# Altium PCB FRONT.PcbDoc (part 3 of 5)
Units mm, origin at the board's own origin, x right, y up, seen from the top; angles counter-clockwise.
Board outline 100 x 68 mm, 4 copper layers (Top Layer, Layer 1, Layer 2, Bottom Layer), stack 1.484 mm thick; 322 components, 276 nets, 1438 pads, 1119 vias.
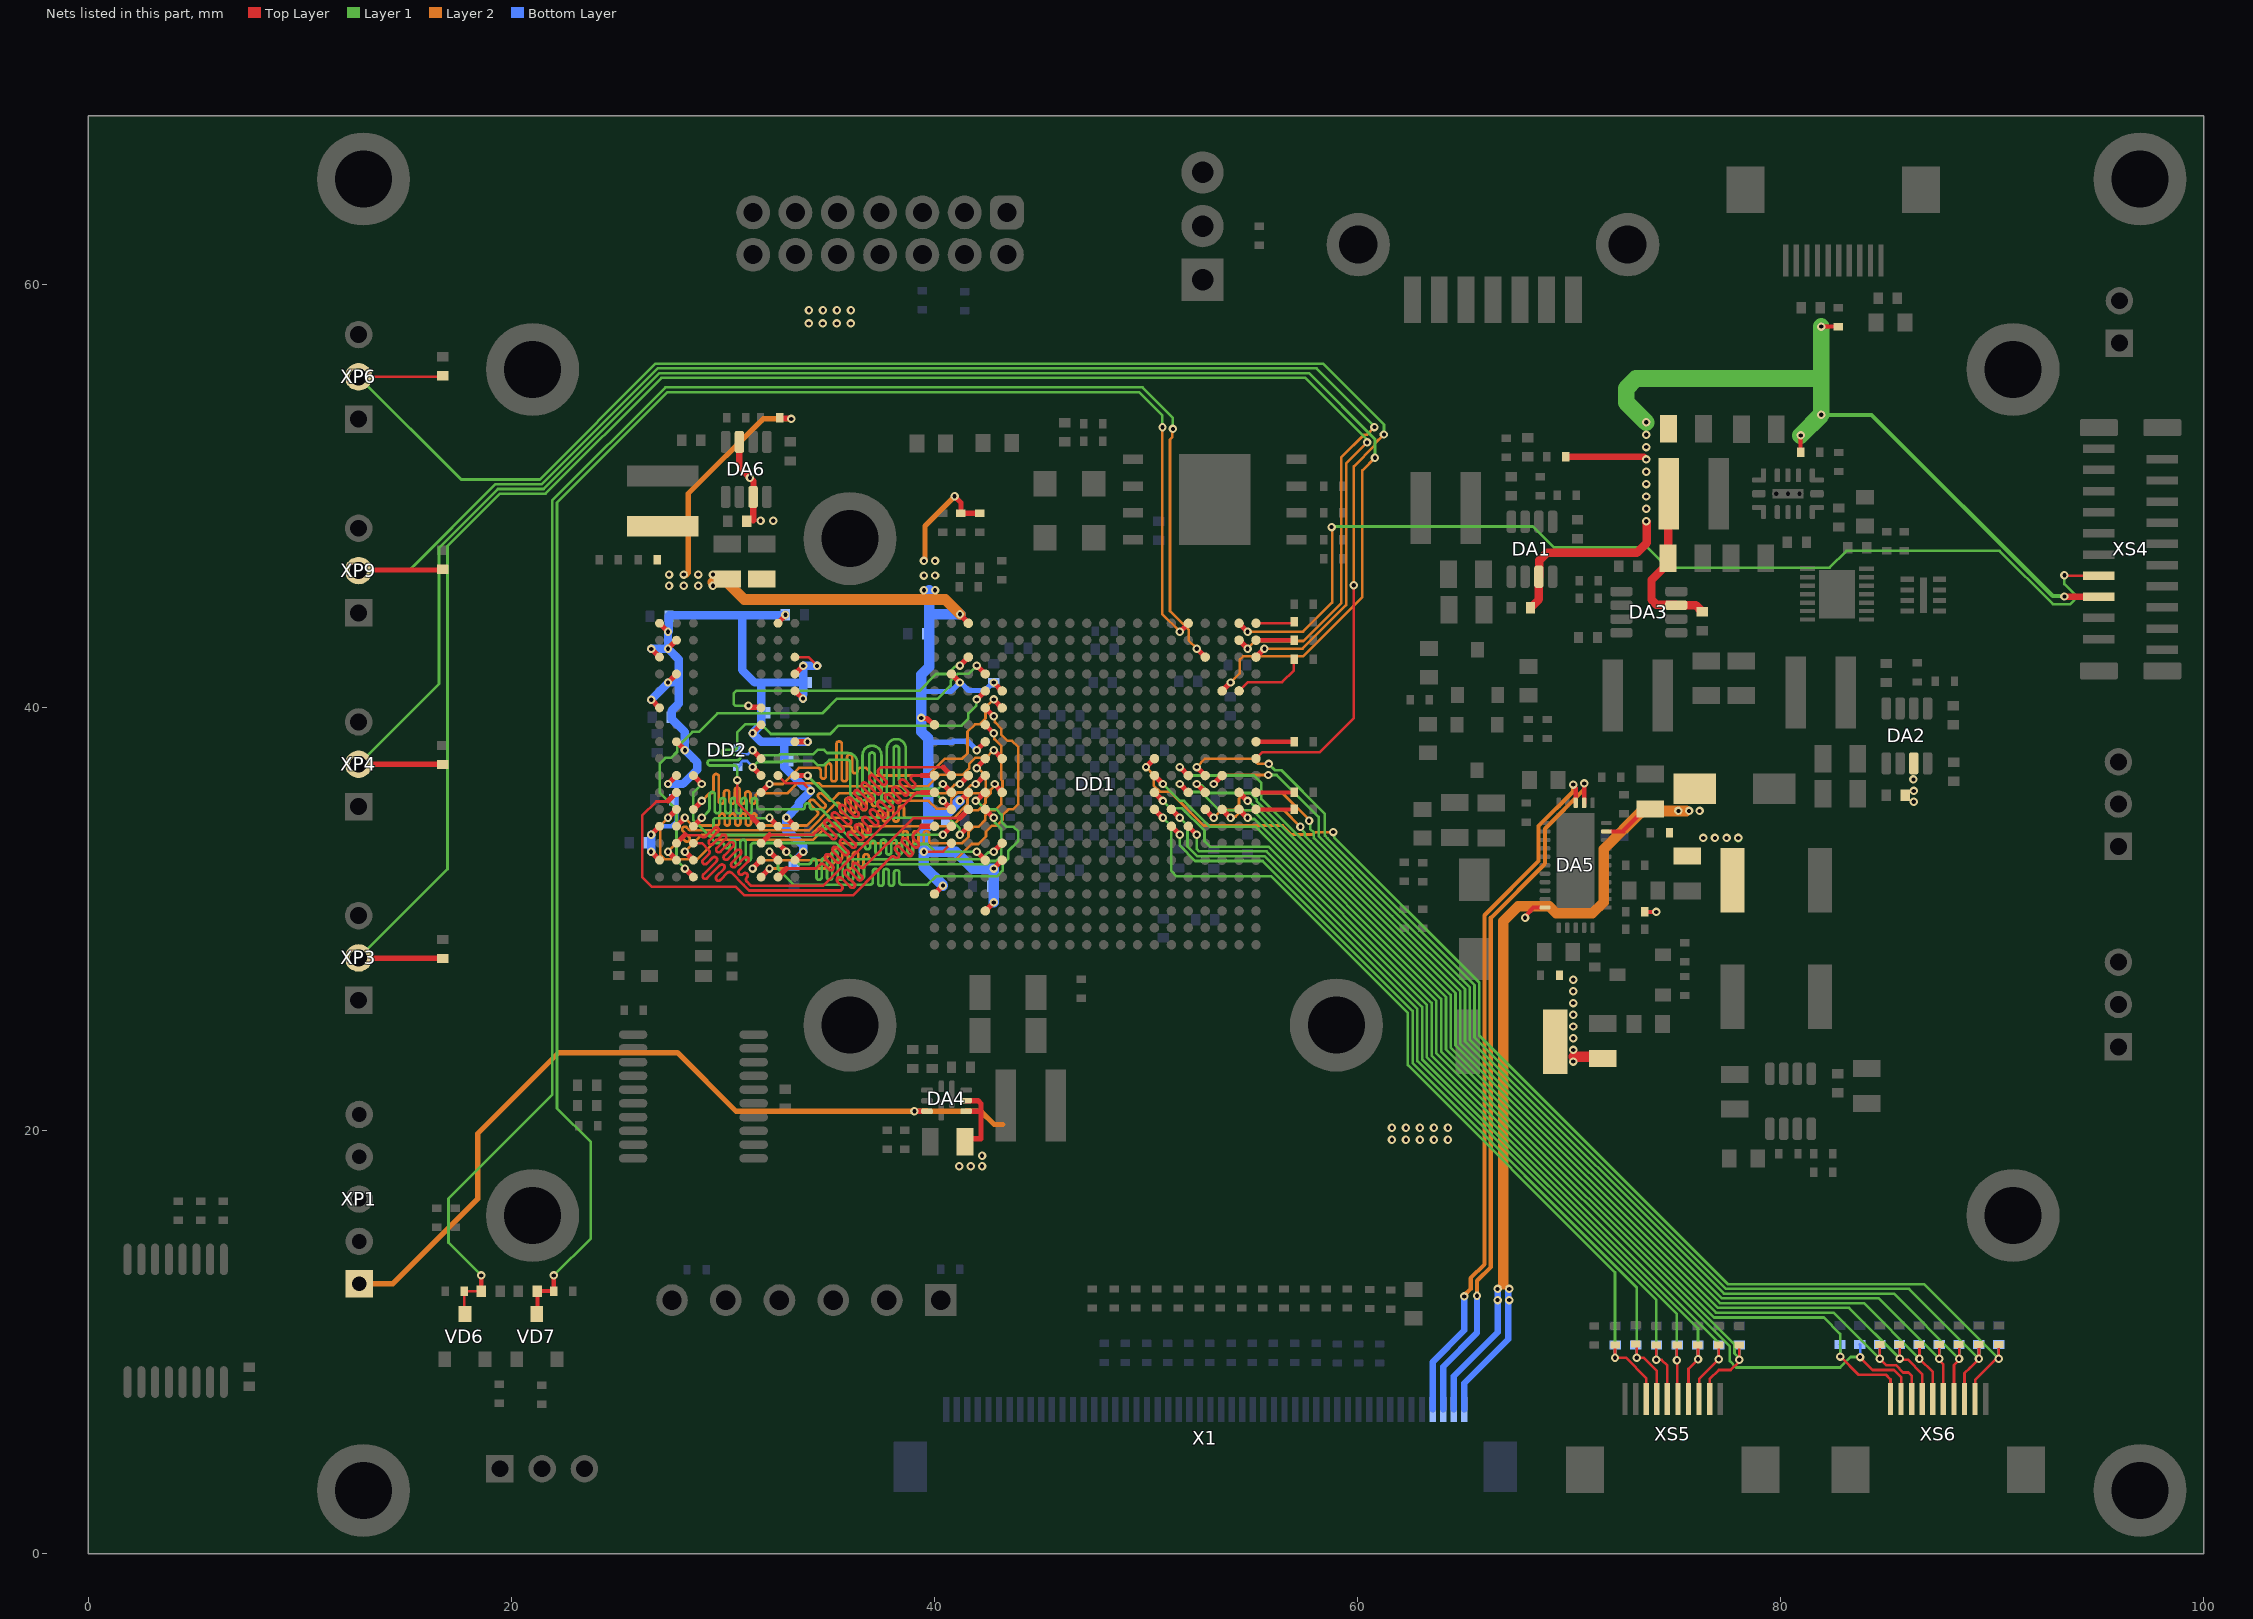
[diagram p4: the nets of this part, all layers, seen from the top]

## Via types
v1: diameter 0.4, hole 0.2, Top Layer to Bottom Layer, tented both sides, 828 vias
v2: diameter 0.6, hole 0.3, Top Layer to Bottom Layer, tented both sides, 265 vias
v3: diameter 0.8, hole 0.4, Top Layer to Bottom Layer, 12 vias
v4: diameter 0.5, hole 0.3, Top Layer to Bottom Layer, 10 vias
v5: diameter 0.5, hole 0.2, Top Layer to Bottom Layer, 4 vias

## Nets (pads, with @x,y where several pads share a name; then routed paths per layer and width w, separated by ;. In a path a pad name is that pad's centre, name@x,y a point inside that pad or via, vN(x,y) a via of type N, cw(c..) or ccw(c..) an arc to the next point about the centre after c; other vN are vias at no path point) (continued)
DDR_BA0: (continued)
  Top Layer w0.25: v1(27.4,34.8) DD2.M2@27.8,35.2 ; v1(42.85,36.4) 42.85,36.375 43.2,36.025 DD1.L5@43.2,36
  Layer 2 w0.125: v1(27.4,34.8) 27.037,34.437 27.037,33.05 27.25,32.837 28.762,32.837 29.687,33.762 34.25,33.762 34.887,34.4 35.969,34.4 cw(c35.969,34.275) 36.094,34.275 ccw(c36.219,34.275) 36.344,34.275 36.344,34.4 cw(c36.469,34.4) 36.594,34.4 36.594,34.014 ccw(c36.719,34.014) 36.844,34.014 36.844,34.275 cw(c36.969,34.275) 36.969,34.4 37.031,34.4 40.831,34.4 41.593,35.162 42.075,35.162 42.411,35.499 42.411,35.724 42.65,35.963 42.65,36.126 42.85,36.326 v1(42.85,36.4)
DDR_BA1: DD1.R4 DD2.N8 | length 22.3
  Top Layer w0.25: v1(32.2,34.8) DD2.N8@32.6,34.4 ; v1(42,33.2) DD1.R4@42.4,32.8
  Layer 1 w0.125: v1(32.2,34.8) 32.186,34.786 29.622,34.786 29.549,34.713 29.549,34.104 29.665,33.988 35.469,33.988 35.569,33.887 35.894,33.562 36.588,33.562 cw(c36.588,33.437) 36.713,33.437 ccw(c36.838,33.437) 36.963,33.437 36.963,33.592 cw(c37.088,33.592) 37.213,33.592 37.213,33.187 ccw(c37.338,33.187) 37.463,33.187 37.463,33.65 cw(c37.588,33.65) 37.713,33.65 37.713,33.187 ccw(c37.838,33.187) 37.963,33.187 37.963,33.65 cw(c38.088,33.65) 38.213,33.65 38.213,33.187 ccw(c38.338,33.187) 38.463,33.187 38.463,33.65 cw(c38.588,33.65) 38.713,33.65 38.713,33.187 ccw(c38.838,33.187) 38.963,33.187 38.963,33.437 cw(c39.088,33.437) 39.088,33.562 39.65,33.562 40.013,33.2 v1(42,33.2)
DDR_BA2: DD1.J5 DD2.M3 | length 22
  Top Layer w0.25: DD2.M3@28.6,35.2 v1(29,35.6) ; v1(42.8,38) DD1.J5@43.2,37.6
  Layer 2 w0.125: v1(29,35.6) 29.362,35.963 29.425,35.963 ccw(c29.425,36.088) 29.55,36.088 29.55,36.746 cw(c29.675,36.746) 29.8,36.746 29.8,35.587 ccw(c29.925,35.587) 30.05,35.587 30.05,35.984 cw(c30.175,35.984) 30.3,35.984 30.3,35.587 ccw(c30.425,35.587) 30.55,35.587 30.55,36.1 cw(c30.675,36.1) 30.8,36.1 30.8,35.587 ccw(c30.925,35.587) 31.05,35.587 31.05,35.923 cw(c31.175,35.923) 31.3,35.923 31.3,35.595 ccw(c31.425,35.595) 31.55,35.595 31.55,35.838 cw(c31.675,35.838) 31.675,35.963 32.986,35.963 33.041,35.963 33.516,36.437 34.544,36.437 34.681,36.3 39.7,36.3 40.238,36.838 41.35,36.838 41.637,37.125 41.637,37.35 41.925,37.637 42.438,37.637 v1(42.8,38)
DDR_CAS#: DD1.P5 DD2.K3 | length 22.3
  Top Layer w0.25: DD2.K3@28.6,36.8 v1(29,36.4) ; v1(42.8,33.2) DD1.P5@43.2,33.6
  Layer 1 w0.125: v1(29,36.4) 28.6,36 28.6,34.687 29.357,33.93 29.678,33.609 29.947,33.609 cw(c29.947,33.484) 30.072,33.484 ccw(c30.197,33.484) 30.322,33.484 30.322,33.61 cw(c30.447,33.61) 30.572,33.61 30.572,32.719 ccw(c30.697,32.719) 30.822,32.719 30.822,33.638 cw(c30.947,33.638) 31.072,33.638 31.072,32.888 ccw(c31.197,32.888) 31.322,32.888 31.322,33.484 cw(c31.447,33.484) 31.447,33.609 32.509,33.609 35.341,33.609 36.113,32.837 41.563,32.837 42.212,32.837 42.538,33.164 42.764,33.164 v1(42.8,33.2)
DDR_CK_N: DD1.M2 DD2.K7 R68.1 | length 22.4
  Top Layer w0.25: v1(31.4,37.2) DD2.K7@31.8,36.8 ; v1(40.4,35.6) DD1.M2@40.8,35.2
  Layer 1 w0.125: v1(31.4,37.2) 31.638,37.437 32.785,37.437 32.835,37.487 34.275,37.487 34.475,37.287 34.775,37.287 35.029,37.541 35.096,37.541 35.896,37.541 cw(c35.896,37.416) 36.021,37.416 36.021,36.036 ccw(c36.471,36.036) 36.921,36.036 36.921,37.762 cw(c37.046,37.762) 37.171,37.762 37.171,35.7 ccw(c37.621,35.7) 38.071,35.7 38.071,38.073 cw(c38.196,38.073) 38.321,38.073 38.321,36.585 ccw(c38.771,36.585) 38.454,36.266 38.882,35.837 40.163,35.837 v1(40.4,35.6)
  Bottom Layer w0.125: R68.1@30.687,37.2 30.737,37.2 30.85,37.313 30.85,37.414 30.923,37.488 31.143,37.488 31.4,37.231 v1(31.4,37.2)
DDR_CK_P: DD1.L2 DD2.J7 R68.2 | length 22.3
  Top Layer w0.25: v1(31.4,38) DD2.J7@31.8,37.6 ; v1(40.4,36.4) DD1.L2@40.8,36
  Layer 1 w0.125: v1(31.4,38) 31.638,37.762 32.65,37.762 32.7,37.812 34.275,37.812 34.475,38.012 34.775,38.012 34.921,37.866 35.096,37.866 35.896,37.866 cw(c35.896,37.416) 36.346,37.416 36.346,36.036 ccw(c36.471,36.036) 36.596,36.036 36.596,37.762 cw(c37.046,37.762) 37.496,37.762 37.496,35.7 ccw(c37.621,35.7) 37.746,35.7 37.746,38.073 cw(c38.196,38.073) 38.646,38.073 38.646,36.585 ccw(c38.771,36.585) 38.682,36.496 39.016,36.162 40.163,36.162 v1(40.4,36.4)
  Bottom Layer w0.125: R68.2@30.687,38.1 30.737,38.1 30.85,37.988 30.85,37.886 30.923,37.813 31.189,37.813 31.377,38 v1(31.4,38)
DDR_CKE0: DD1.N3 DD2.K9 | length 9.7
  Top Layer w0.25: DD2.K9@33.4,36.8 v1(34,36.8) ; v1(41.2,34) DD1.N3@41.6,34.4
  Layer 1 w0.125: v1@34,36.791 35.991,34.8 40.696,34.8 41.199,34.297 41.199,34.001 v1(41.2,34)
DDR_CS#: DD1.N1 DD2.L2 | length 24.1
  Top Layer w0.125: DD2.L2@27.8,36 27.373,35.572 26.846,35.572 26.175,34.902 26.175,32 26.625,31.55 30.6,31.55 31.013,31.137 36.137,31.137 37.322,32.322 37.942,32.942 cw(c38.03,32.853) 38.118,32.942 ccw(c38.207,33.03) 38.295,32.942 ccw(c38.207,33.03) 38.295,33.118 38.161,33.252 cw(c38.25,33.341) 38.161,33.429 cw(c38.25,33.341) 38.338,33.429 38.744,33.024 ccw(c38.832,33.112) 38.92,33.024 ccw(c38.832,33.112) 38.92,33.2 38.491,33.63 cw(c38.579,33.718) 38.491,33.806 cw(c38.579,33.718) 38.668,33.806 39.042,33.432 ccw(c39.131,33.52) 39.219,33.432 ccw(c39.131,33.52) 39.219,33.609 39.002,33.825 cw(c39.091,33.914) 39.002,34.002 39.4,34.4
  Top Layer w0.25: 27.4,35.6 DD2.L2@27.8,36 ; 39.4,34.4 DD1.N1@40,34.4
DDR_D0: DD1.C3 DD2.F7 | length 13.7
  Top Layer w0.25: v1(31.2,40.105) 31.241,40.105 31.313,40.033 31.767,40.033 DD2.F7@31.8,40 ; v1(41.2,42) DD1.C3@41.6,42.4
  Layer 1 w0.125: v1(31.2,40.105) 31.191,40.097 30.588,40.097 30.514,40.17 30.514,40.696 30.622,40.804 39.283,40.804 40.079,41.6 40.612,41.6 40.959,41.947 41.147,41.947 v1(41.2,42)